# EAGLE board LowTemp_singleboard (EAGLE 6.4)
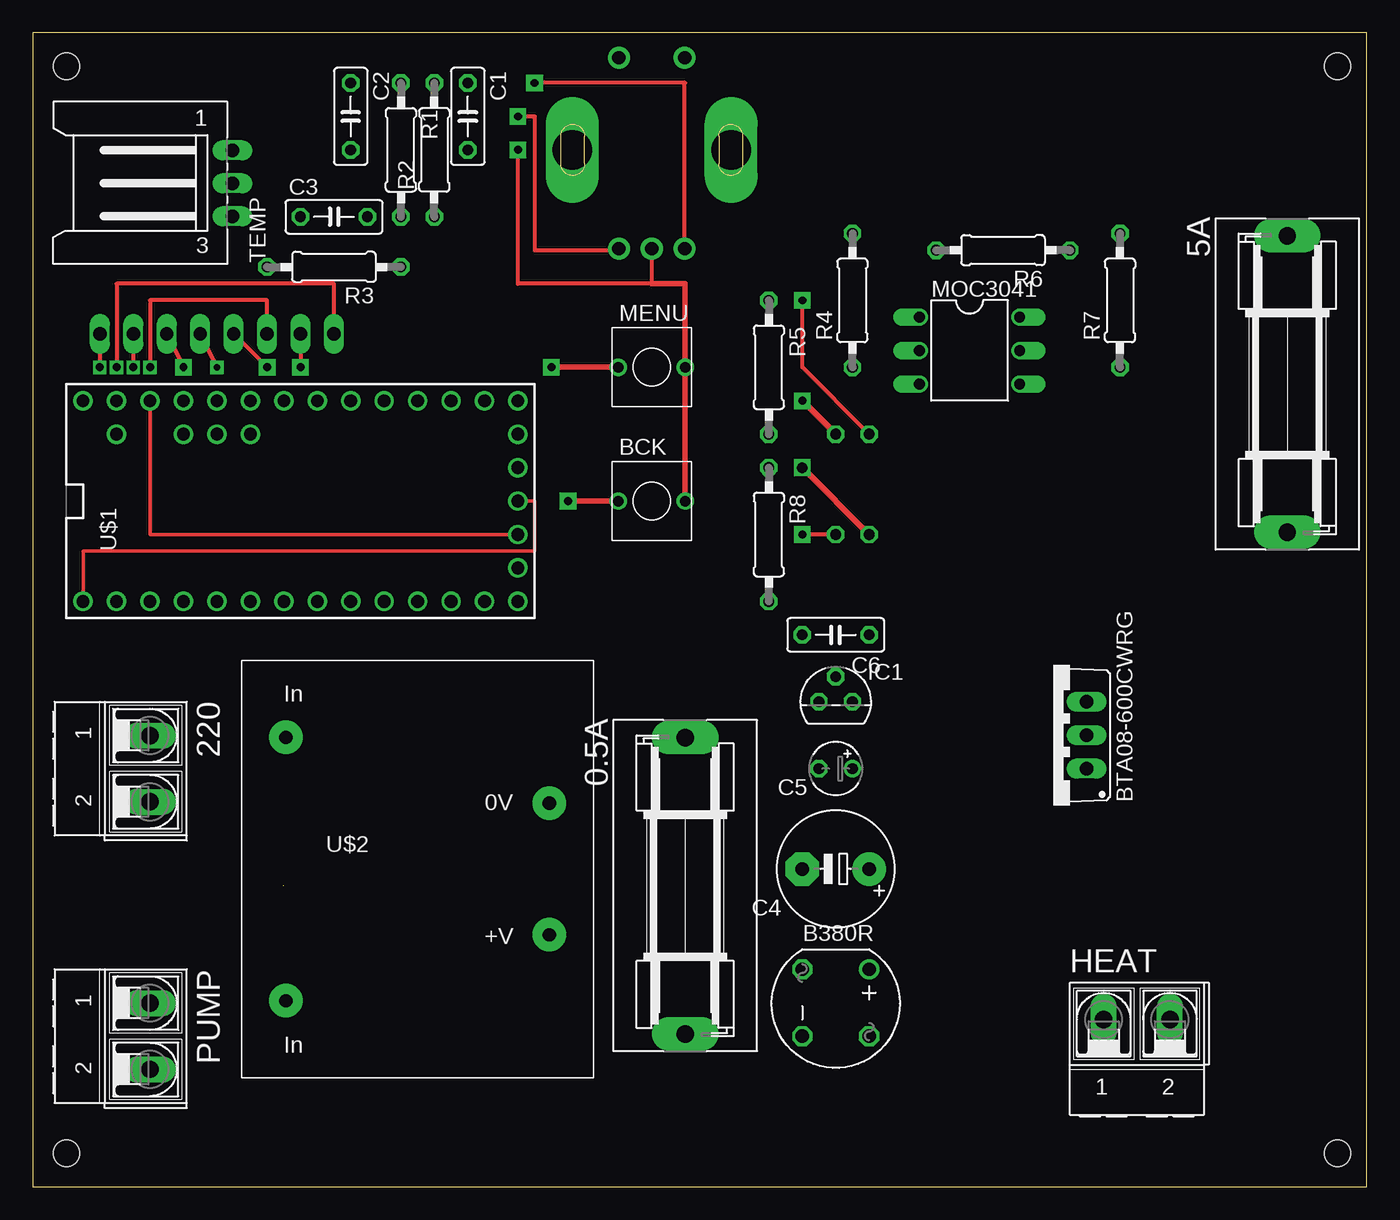
[diagram p0: board, top side]
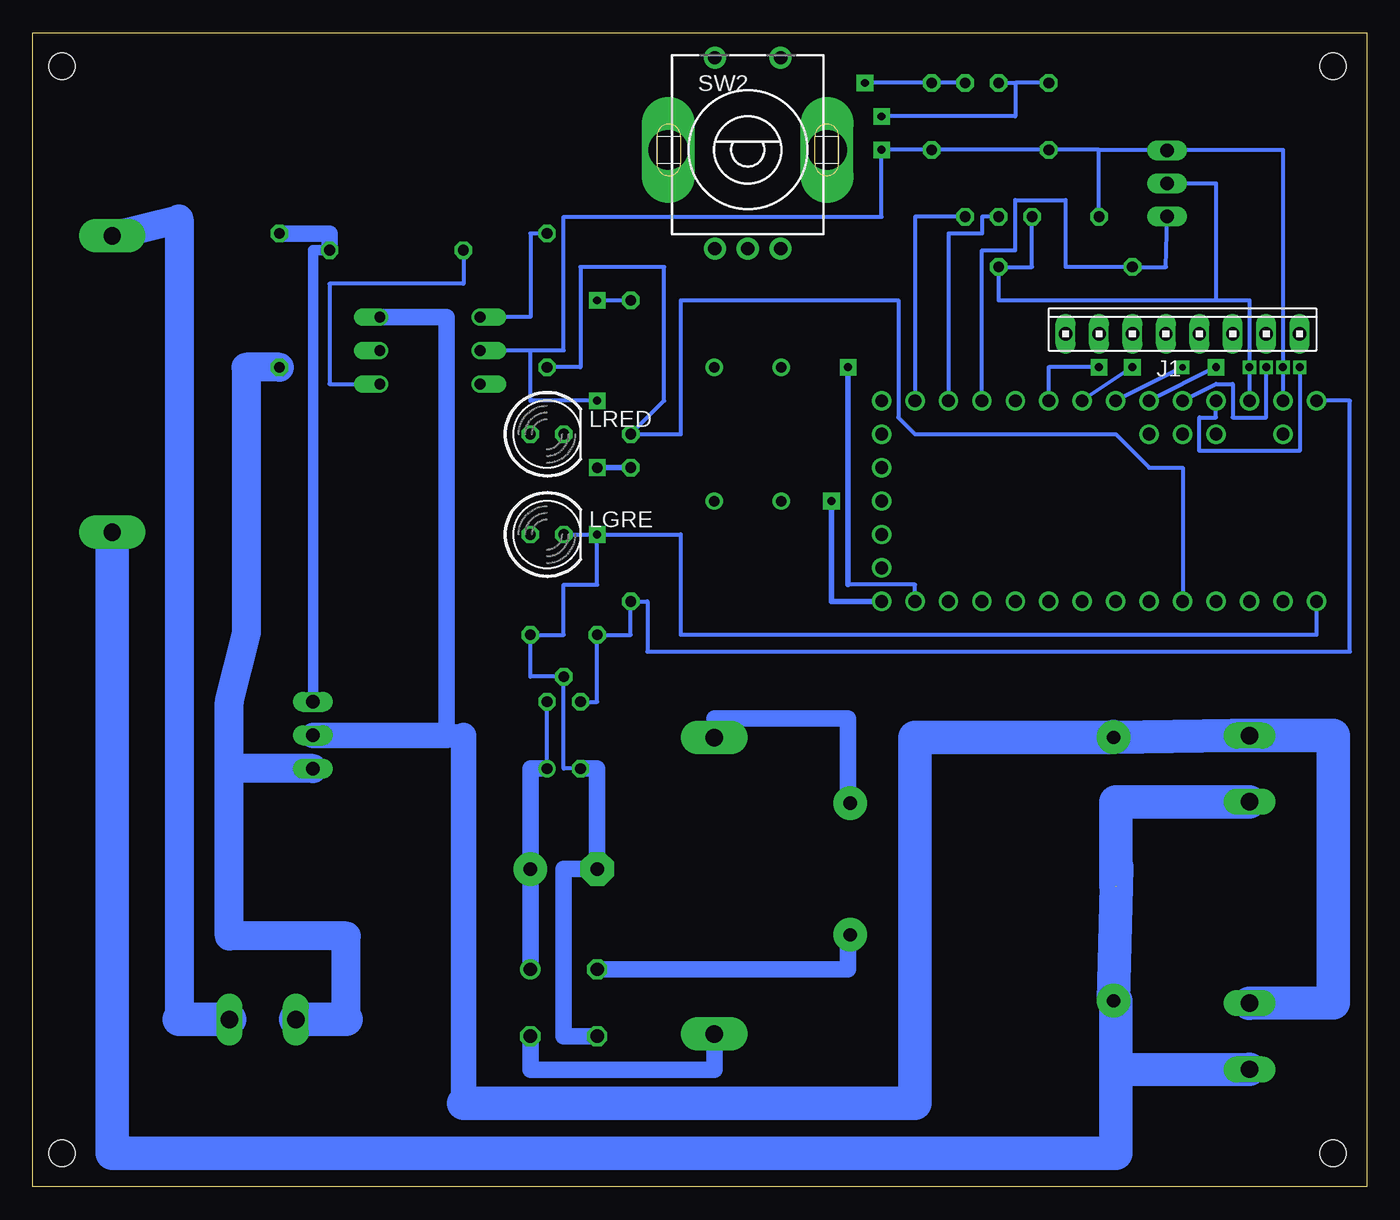
[diagram p1: board, bottom side, seen from below]

Size 101.27 x 87.62 mm. Coordinates in mm from the lower left corner, seen from the top.
Outline: 0,0 101.27,0 101.27,87.62 0,87.62 0,0
Copper layers (1*16): Top 0.035mm / dielectric 1.5mm / Bottom 0.035mm
Design rules "default": minimum track width 10mil, minimum drill 24mil, track to track 8mil, track to pad 8mil, pad to pad 8mil, via to via 8mil, smd to smd 8mil, copper to edge 40mil, drill to drill 8mil, minimum pad ring 10mil, minimum via ring 8mil, stop-mask expansion 4mil, vias tented up to drill 0mil, thermal gap 10mil
Holes 2 mm at 2.54,2.54 99.06,2.54 99.06,85.09 2.54,85.09

## Footprints (pad centres in the part's own frame; a part is rotated, then mirrored left to right if it is on the bottom)
SH22,5A = drill 1.321 pad 2.54 long: 1 -11.252,0; 2 11.252,0
AK500/2-H = drill 1.321 long: 1 -2.515,0; 2 2.515,0
RB1A = drill 1.016: + -2.54,2.54 | drill 1.016 octagon: - 2.54,-2.54; AC1 2.54,2.54; AC2 -2.54,-2.54
2PIN = drill 0.8: 1 -2.54,0; 2 2.54,0
TO220BV = drill 1.016 long: G 2.54,-2.54; T1 -2.54,-2.54; T2 0,-2.54
C050-025X075 = drill 0.813 octagon: 1 -2.54,0; 2 2.54,0
E5-8,5 = drill 1.016 pad 2.54: + -2.54,0 | drill 1.016 pad 2.54 octagon: - 2.54,0
TT2D4 = drill 0.813: + -1.27,0 | drill 0.813 octagon: - 1.27,0
TO92 = drill 0.813 octagon: 1 -1.27,0; 2 0,1.905; 3 1.27,0
10X08MTA = drill 1.016 long: 1 8.89,0; 2 6.35,0; 3 3.81,0; 4 1.27,0; 5 -1.27,0; 6 -3.81,0; 7 -6.35,0; 8 -8.89,0
LED5MM = drill 0.813 octagon: A -1.27,0; K 1.27,0
DIL06 = drill 0.813 offset: 1 -2.54,-3.81; 2 0,-3.81; 3 2.54,-3.81; 4 2.54,3.81; 5 0,3.81; 6 -2.54,3.81
0207/10 = drill 0.813 octagon: 1 -5.08,0; 2 5.08,0
EC11B-V = drill 1 pad 1.676: A -2.5,-7.5; B 2.5,-7.5; C 0,-7.5; D -2.5,7; E 2.5,7 | drill 3 pad 3.3 long: G1 -6.032,0; G2 6.032,0
L03P = drill 1.016 long: 1 2.5,-6.25; 2 0,-6.25; 3 -2.5,-6.25
TEENSY_3.0+4 = drill 0.965: 0 -7.62,13.97; 1 -7.62,11.43; 2 -7.62,8.89; 3 -7.62,6.35; 3.3V 7.62,11.43; 3.3V1 -2.54,-16.51; 4 -7.62,3.81; 5 -7.62,1.27; 6 -7.62,-1.27; 7 -7.62,-3.81; 8 -7.62,-6.35; 9 -7.62,-8.89; 10 -7.62,-11.43; 11 -7.62,-13.97; 12 -7.62,-16.51; 13 7.62,-16.51; 14/A0 7.62,-13.97; 15/A1 7.62,-11.43; 16/A2 7.62,-8.89; 17/A3 7.62,-6.35; 18/A4 7.62,-3.81; 19/A5 7.62,-1.27; 20/A6 7.62,1.27; 21/A7 7.62,3.81; 22/A8 7.62,6.35; 23/A9 7.62,8.89; A10 5.08,6.35; A11 5.08,3.81; AGND 7.62,13.97; AREF 5.08,8.89; GND -7.62,16.51; GND1 0,-16.51; PGM 2.54,-16.51; RESET 5.08,-16.51; VBAT -5.08,-16.51; VIN 7.62,16.51; VUSB 5.08,13.97
1 = drill 1 pad 2.54: 1 -10,10; 5 -10,-10; 7 10,-5; 9 10,5

## Placement (x,y rotation side)
0.5A  [SH22,5A]  49.53,22.86 270 top
5A  [SH22,5A]  95.25,60.96 270 top
220  [AK500/2-H]  8.89,31.75 270 top
B380R  [RB1A]  60.96,13.97 270 top
BCK  2PIN  [2PIN]  46.99,52.07 0 top
BTA08-600CWRG  BT138-V  [TO220BV]  77.47,34.29 90 top
C1  0,1µF  [C050-025X075]  33.02,81.28 270 top
C2  0,1µF  [C050-025X075]  24.13,81.28 270 top
C3  0,1µF  [C050-025X075]  22.86,73.66 0 top
C4  470µF  [E5-8,5]  60.96,24.13 180 top
C5  3,3µF  [TT2D4]  60.96,31.75 180 top
C6  0,1µF  [C050-025X075]  60.96,41.91 180 top
HEAT  [AK500/2-H]  83.82,12.7 0 top
IC1  7805L  [TO92]  60.96,36.83 0 top
J1  SCREEN  [10X08MTA]  13.97,64.77 0 bottom
LGRE  [LED5MM]  62.23,49.53 0 bottom
LRED  [LED5MM]  62.23,57.15 0 bottom
MENU  2PIN  [2PIN]  46.99,62.23 0 top
MOC3041  MOC3021M  [DIL06]  71.12,63.5 270 top
PUMP  [AK500/2-H]  8.89,11.43 270 top
R1  10kΩ  [0207/10]  27.94,78.74 270 top
R2  10kΩ  [0207/10]  30.48,78.74 90 top
R3  47kΩ  [0207/10]  22.86,69.85 180 top
R4  130Ω  [0207/10]  62.23,67.31 90 top
R5  120Ω  [0207/10]  55.88,62.23 270 top
R6  360Ω  [0207/10]  73.66,71.12 180 top
R7  63Ω  [0207/10]  82.55,67.31 90 top
R8  330Ω  [0207/10]  55.88,49.53 270 top
SW2  EC11B-V  [EC11B-V]  46.99,78.74 0 bottom
TEMP  [L03P]  8.89,76.2 90 top
U$1  TEENSY_3.0+4  [TEENSY_3.0+4]  20.32,52.07 90 top
U$2  [1]  29.21,24.13 0 top

## Library data of the parts
0.5A 5A = fuse; MPN: 0031.7701.11; OC_FARNELL: unknown; OC_NEWARK: 04F1224
220 HEAT PUMP = con-ptr500; OC_FARNELL: unknown; OC_NEWARK: unknown
B380R = rectifier
BCK MENU = switch-misc
BTA08-600CWRG = triac
C1-C6 R1-R8 = resistor
IC1 = linear
J1 = con-amp
LGRE LRED = led
MOC3041 = optocoupler; MF: FAIRCHILD SEMICONDUCTOR; MPN: MOC3021-M; OC_FARNELL: 1021365; OC_NEWARK: 95B7895
SW2 = alps
TEMP = con-amp-mt; OC_FARNELL: unknown; OC_NEWARK: unknown
U$1 = Teensy3.0
U$2 = myrra

## Nets
220AC: 220.1
220VA: BTA08-600CWRG.T2 MOC3041.6 PUMP.1 U$2.1
220VC: 5A.2 220.2 PUMP.2 U$2.5
+3V3: C3.2 J1.6 R3.1 TEMP.2 U$1.3.3V U$1.3.3V1
+5V: C6.2 IC1.1 R8.2 U$1.VIN
AGND: BCK.2 C1.2 C2.2 C3.1 J1.8 LRED.K MENU.2 MOC3041.2 SW2.C TEMP.1 U$1.AGND
AREF: U$1.AREF
BTBCK: BCK.1 U$1.12
BTMENU: MENU.1 U$1.11
GND: B380R.- C4.- C5.- C6.1 IC1.2 LGRE.K U$1.GND U$1.GND1
HEAT: R4.1 R5.2 U$1.3
N$1: C1.1 R2.2 SW2.A
N$2: C2.1 R1.1 SW2.B
N$3: MOC3041.1 R4.2
N$4: LRED.A R5.1
N$5: MOC3041.4 R6.2
N$6: BTA08-600CWRG.G R6.1 R7.2
N$7: 0.5A.1 U$2.9
N$8: BTA08-600CWRG.T1 HEAT.1 R7.1
N$9: 5A.1 HEAT.2
N$10: B380R.AC2 U$2.7
N$11: 0.5A.2 B380R.AC1
N$13: B380R.+ C4.+ C5.+ IC1.3
N$15: LGRE.A R8.1
ROT1: R2.1 U$1.14/A0
ROT2: R1.2 U$1.15/A1
SBL: J1.7 U$1.18/A4
SCE: J1.2 U$1.22/A8
SCLK: J1.5 U$1.19/A5
SDC: J1.3 U$1.21/A7
SDIN: J1.4 U$1.20/A6
SRST: J1.1 U$1.23/A9
TEMP: R3.2 TEMP.3 U$1.16/A2
VBAT: U$1.VBAT
VUSB: U$1.VUSB

## Tracks (layer width: path | path; a pad name or v marks a point on that pad's centre or on a via)
220VA
  Bottom 1.27: 69.85,34.29 69.85,66.04 MOC3041.6
  Bottom 1.676: 68.58,34.29 69.85,34.29
  Bottom 1.93: BTA08-600CWRG.T2 69.85,34.29 | 68.58,6.35 68.58,34.29
  Bottom 2.54: 19.21,34.21 U$2.1 | U$2.1 34.29,34.13 34.29,6.35 68.58,6.35 | PUMP.1 2.54,13.97 2.54,34.29 10.16,34.27 | U$2.1 10.16,34.27 | 10.16,34.27 8.89,34.29
220VC  (1 unrouted)
  Bottom 1.27: U$2.5 19.05,14.13
  Bottom 2.54: 18.97,24.29 U$2.5 | 19.05,14.13 19.05,8.89 | 19.05,8.89 19.05,2.54 95.25,2.54 5A.2 | PUMP.2 19.05,8.89 | 220.2 19.05,29.21 19.05,22.86
+3V3  (via drill 0.6)
  Top 0.254: U$1.3.3V1 8.89,49.53 U$1.3.3V
  Top 0.305: J1.6 17.78,67.31 8.89,67.31 v8.89,62.23
  Bottom 0.305: U$1.3.3V v8.89,62.23 8.89,67.31 11.43,67.31 | 11.43,67.31 27.94,67.31 R3.1 25.4,69.85 C3.2 | TEMP.2 11.43,76.2 11.43,67.31
+5V
  Bottom 0.305: IC1.1 58.42,36.83 C6.2 55.88,41.91 R8.2 54.61,44.45 54.61,40.64 1.27,40.64 1.27,59.69 U$1.VIN
AGND  (via drill 0.6, 0.6 pad 1.27)
  Top 0.305: J1.8 22.86,68.58 6.35,68.58 v6.35,62.23 | SW2.C 46.99,68.58 36.83,68.58 v36.83,78.74
  Top 0.406: LRED.K v58.42,59.69 | 46.99,68.58 49.53,68.58 MENU.2 BCK.2
  Bottom 0.305: U$1.AGND v6.35,62.23 6.35,78.74 20.32,78.74 | 20.32,78.74 C2.2 C1.2 v36.83,78.74 36.83,73.66 60.96,73.66 60.96,63.5 63.5,63.5 | 63.5,63.5 MOC3041.2 | C3.1 20.32,78.74 | TEMP.1 20.28,78.7 20.32,78.74 | v58.42,59.69 63.5,59.69 63.5,63.5
BTBCK  (via drill 0.6 pad 1.27)
  Top 0.406: BCK.1 v40.64,52.07
  Bottom 0.406: U$1.12 40.64,44.45 v40.64,52.07
BTMENU  (via drill 0.6 pad 1.27)
  Top 0.406: MENU.1 v39.37,62.23
  Bottom 0.305: U$1.11 34.29,45.72 39.37,45.72
  Bottom 0.406: 39.37,45.72 v39.37,62.23
GND  (via drill 0.6 pad 1.27)
  Top 0.254: U$1.GND1 38.1,52.07 38.1,48.26 3.81,48.26 U$1.GND
  Top 0.305: LGRE.K v58.42,49.53
  Bottom 0.305: C5.- 60.96,31.75 IC1.2 63.5,38.73 C6.1 60.96,41.91 60.96,45.72 58.42,45.72 v58.42,49.53 | U$1.GND 3.81,41.91 52.07,41.91 52.07,49.53 v58.42,49.53 | LGRE.K v58.42,49.53
  Bottom 1.27: B380R.- 60.96,11.43 60.96,24.13 C4.- 58.42,31.75 C5.-
HEAT
  Bottom 0.305: R4.1 59.69,62.23 59.69,69.85 53.34,69.85 53.34,59.69 R5.2 52.07,57.15 52.07,67.31 35.56,67.31 35.56,58.42 34.29,57.15 19.05,57.15 16.51,54.61 13.97,54.61 U$1.3
N$1  (via drill 0.6 pad 1.27)
  Top 0.305: SW2.A 49.49,83.78 49.53,83.82 v38.1,83.82
  Bottom 0.305: R2.2 C1.1 v38.1,83.82
N$2  (via drill 0.6 pad 1.27)
  Top 0.305: v36.83,81.28 38.1,81.28 38.1,71.12 44.49,71.12 SW2.B
  Bottom 0.305: C2.1 26.67,83.82 | R1.1 26.67,83.82 | 26.67,83.82 26.67,81.28 v36.83,81.28
N$3
  Bottom 0.305: R4.2 63.5,72.39 63.5,66.04 MOC3041.1
N$4  (via drill 0.6 pad 1.27)
  Top 0.305: LRED.A 58.42,62.23 v58.42,67.31
  Bottom 0.305: v58.42,67.31 R5.1
N$5
  Bottom 0.305: R6.2 68.58,68.58 78.74,68.58 78.74,60.96 MOC3041.4
N$6
  Bottom 0.813: R6.1 80.01,71.12 BTA08-600CWRG.G
  Bottom 1.27: R7.2 78.74,72.39 R6.1
N$7
  Bottom 1.27: U$2.9 39.37,29.13 39.37,35.56 49.53,35.56 0.5A.1
N$8
  Bottom 2.184: R7.1 85.09,62.23 85.09,41.91 86.36,36.83 86.36,31.75 | 77.47,12.7 77.47,19.05 86.36,19.05 86.36,31.75 | BTA08-600CWRG.T1 86.36,31.75
  Bottom 2.54: 77.47,12.7 HEAT.1
N$9
  Bottom 2.184: 5A.1 90.17,73.48 90.17,12.7
  Bottom 2.54: HEAT.2 90.17,12.7
N$10
  Bottom 1.27: U$2.7 39.37,19.13 39.37,16.51 B380R.AC2
N$11
  Bottom 1.27: 0.5A.2 49.53,8.89 63.5,8.89 B380R.AC1
N$13
  Bottom 0.305: C5.+ IC1.3
  Bottom 1.27: B380R.+ C4.+ 63.5,31.75 C5.+
N$15  (via drill 0.8 pad 1.27)
  Top 0.406: v58.42,54.61 LGRE.A
  Bottom 0.406: R8.1 v58.42,54.61
ROT1
  Bottom 0.305: R2.1 34.29,73.66 U$1.14/A0
ROT2
  Bottom 0.305: R1.2 29.21,73.66 29.21,72.39 31.75,72.39 U$1.15/A1
SBL  (via drill 0.6, 0.6 pad 1.27)
  Top 0.305: J1.7 v20.32,62.23
  Bottom 0.305: U$1.18/A4 24.13,62.23 v20.32,62.23
SCE  (via drill 0.6)
  Top 0.305: J1.2 v7.62,62.23
  Bottom 0.305: U$1.22/A8 11.43,60.96 10.16,60.96 10.16,58.42 7.62,58.42 v7.62,62.23
SCLK  (via drill 0.6 pad 1.27)
  Top 0.305: J1.5 v17.78,62.23
  Bottom 0.305: v17.78,62.23 U$1.19/A5
SDC  (via drill 0.6 pad 1.27)
  Top 0.305: J1.3 v11.43,62.23
  Bottom 0.305: v11.43,62.23 U$1.21/A7
SDIN  (via drill 0.5 pad 1.02)
  Top 0.305: J1.4 v13.97,62.23
  Bottom 0.305: v13.97,62.23 U$1.20/A6
SRST  (via drill 0.6)
  Top 0.305: J1.1 v5.08,62.23
  Bottom 0.305: v5.08,62.23 5.08,55.88 12.7,55.88 12.7,58.42 11.43,58.42 U$1.23/A9
TEMP
  Bottom 0.305: TEMP.3 15.24,69.85 R3.2 22.86,69.85 22.86,74.93 26.67,74.93 26.67,71.12 29.21,71.12 U$1.16/A2